# Altium PCB LedLampDriver.PcbDoc
Units mm, origin at the board's own origin, x right, y up, seen from the top; angles counter-clockwise.
Board outline 21.5 x 17 mm, 2 copper layers (Top Layer, Bottom Layer); 26 components, 10 nets, 57 pads, 96 vias.
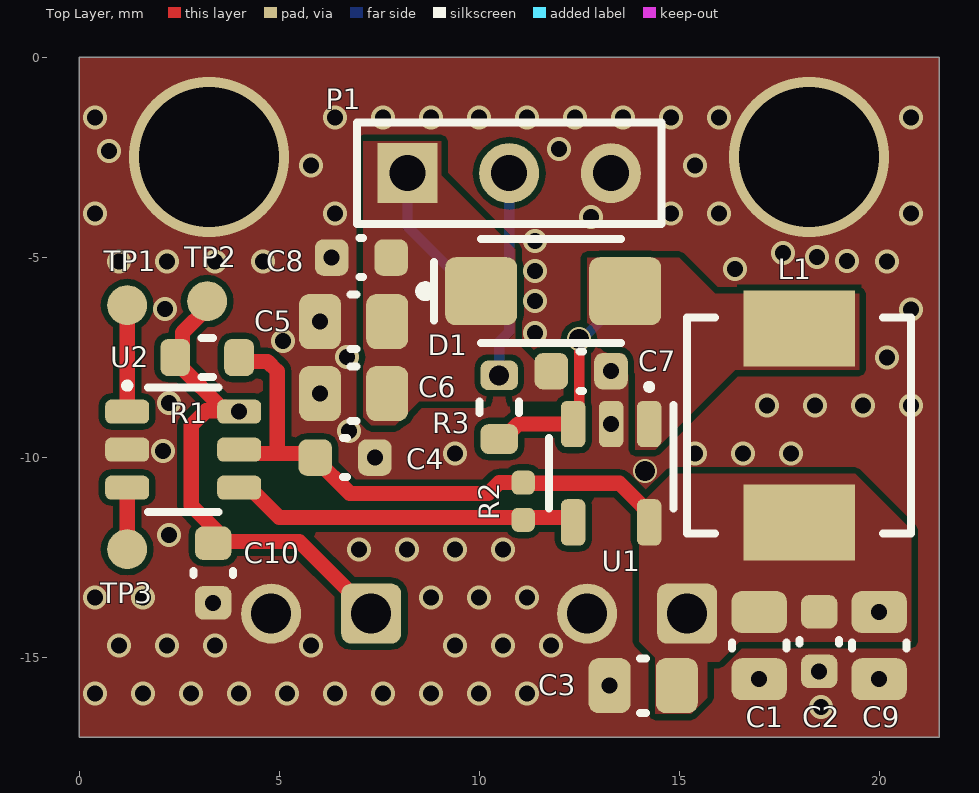
[diagram p0: Top Layer view]
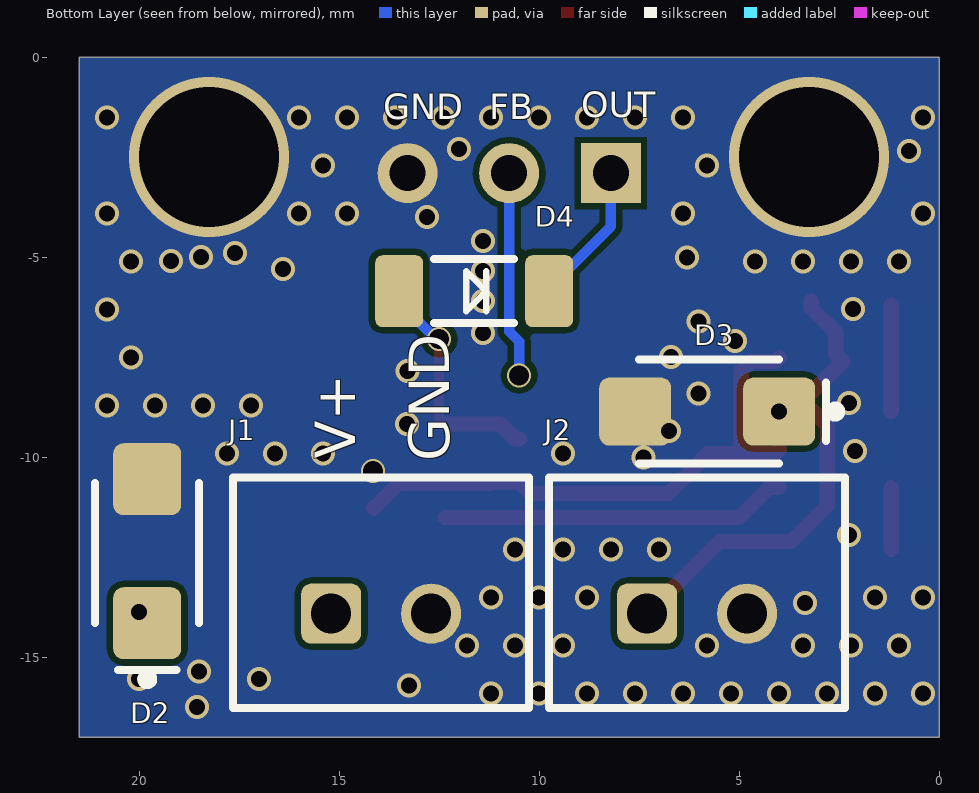
[diagram p1: Bottom Layer view, seen from below]
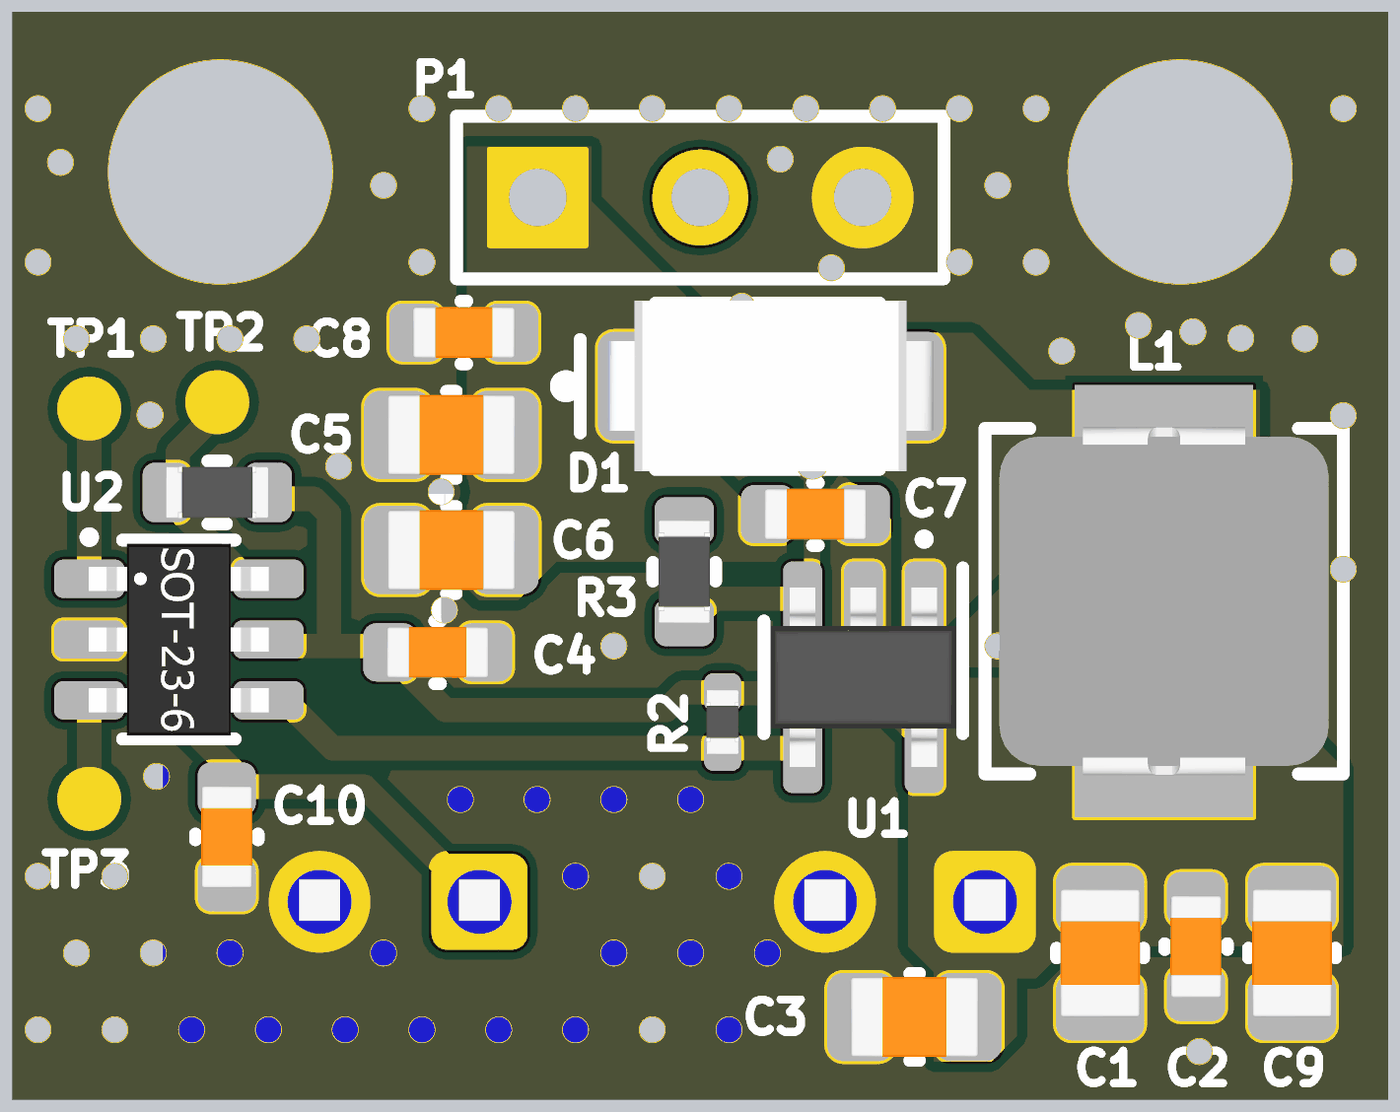
[diagram p2: 3D render of the assembled board from above, using the file's embedded part models]
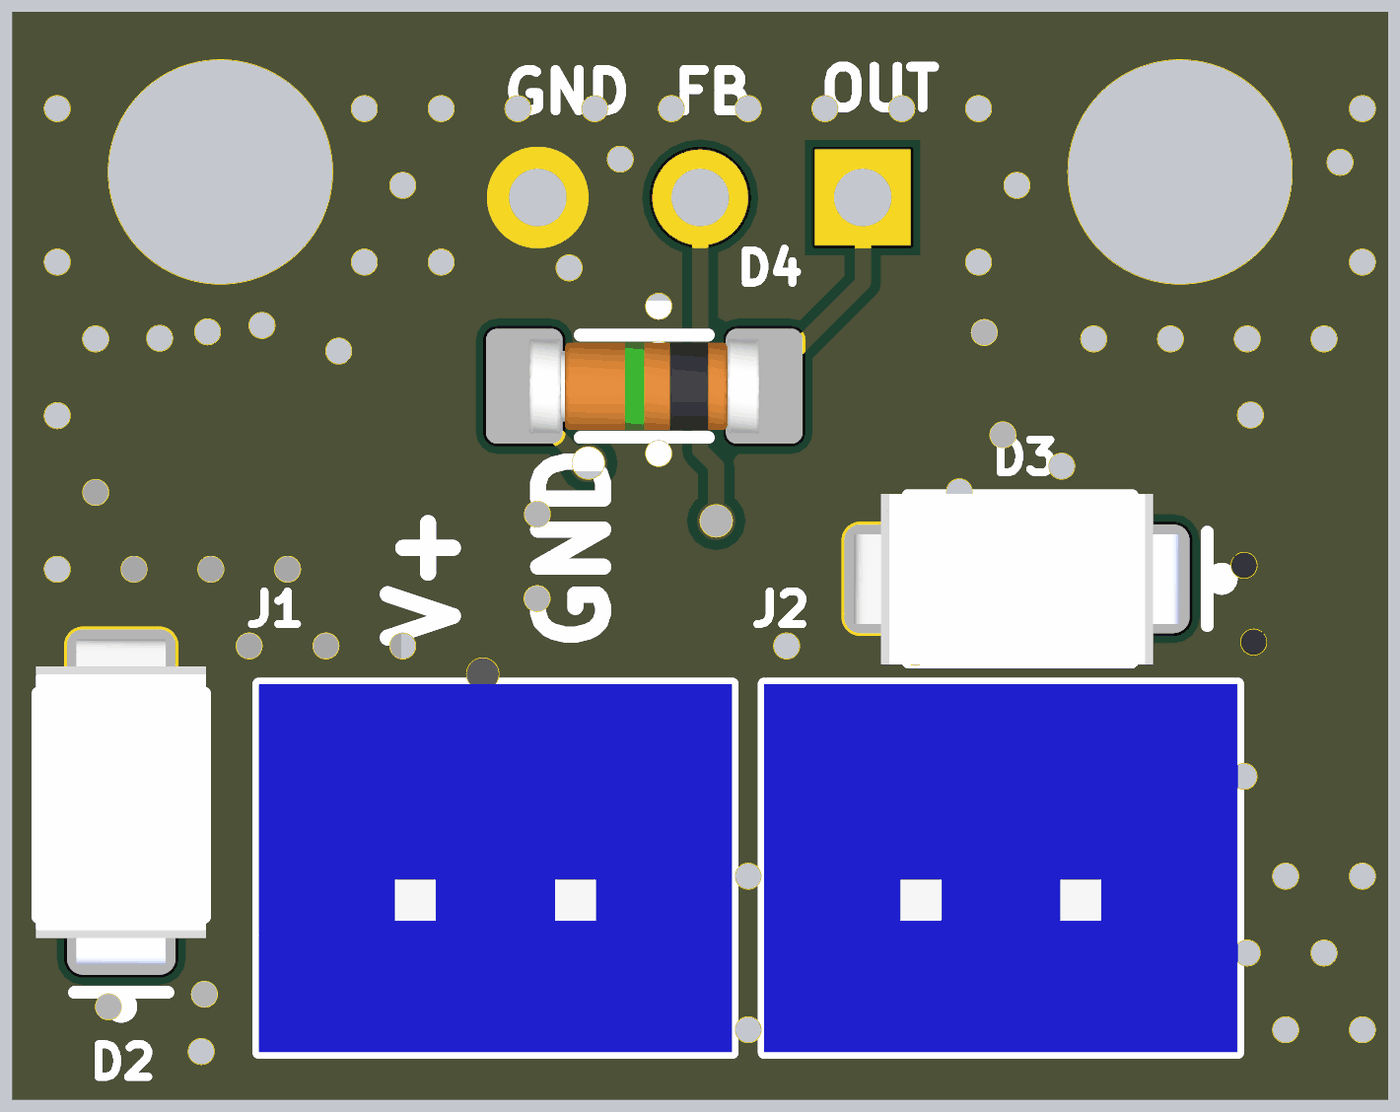
[diagram p3: 3D render of the assembled board from below, using the file's embedded part models]

## Layer stack, top to bottom
Top Solder: solder mask 0.0102, Solder Resist, Dk 3.5
Top Layer: signal copper 0.0356
Dielectric 1: dielectric 0.32, FR-4, Dk 4.8
Bottom Layer: signal copper 0.0356
Bottom Solder: solder mask 0.0102, Solder Resist, Dk 3.5

## Board outline
0,-17 0,0 21.5,0 21.5,-17

## Design rules (kind name [scope] priority, off if disabled: settings)
Clearance [All] p1: gap=0.15 ignorepadtopadclearanceinfootprint=FALSE except(0: Arc-Hole Track-Hole SMDPad-Hole THPad-Hole Via-Hole Fill-Hole Poly-Hole Region-Hole Text-Hole)
HoleSize [All] p1: absolutevalues=TRUE maxlimit=6.3 minlimit=0.2 maxpercent=80.000 minpercent=20.000
MinimumSolderMaskSliver [All] p1: minsoldermaskwidth=0.15
PlaneConnect [All] p1: planeconnectstyle=Direct reliefexpansion=0.508 reliefentries=4 reliefconductorwidth=0.254 reliefairgap=0.254
PolygonConnect [All] p1: connectstyle=Direct reliefconductorwidth=0.254 reliefentries=4 polygonreliefangle="90 Angle" airgapwidth=0.254
RoutingVias [All] p1: holewidth=0.6 width=0.35 viastyle="Through Hole" minholewidth=0.35 minwidth=0.3 maxholewidth=1.7 maxwidth=1.5
SilkToSilkClearance [All] p1: silktosilkclearance=0.15
SilkToSolderMaskClearance [IsPad] p1: minsilkscreentomaskgap=0.08 clearancetoexposedcopper=TRUE
SolderMaskExpansion [All] p1: expansion=0.045 istentingtop=FALSE
Width [All] p1: maxlimit=1.524 minlimit=0.203 preferedwidth=0.254 minimp=50.000000 maximp=50.000000 favimp=50.000000
25 further rules are at their usual default settings.

## Components (designator, comment, footprint, x,y, rotation, side; value= is the part's Value field where it differs from the comment)
C1 "10u" C0805_N 17,-14.71 r270 top
C2 "10u" C0603_N 18.5,-14.61 r270 top
C3 "100n" C0805_N 14.1,-15.71 r180 top
C4 "100n" C0603_N 6.645,-10.01 r0 top
C5 "10u" C0805_N 6.86,-6.61 r180 top
C6 "10u" C0805_N 6.86,-8.41 r180 top
C7 "1u" C0603_N 12.55,-7.85 r0 top
C8 "100n" C0603_N 7.055,-5.01 r180 top
C9 "100n" C0805_N 20,-14.71 r270 top
C10 "100n" C0603_N 3.35,-12.895 r270 top
D1 "DIODE" DO-214AC 11.85,-5.85 r0 top
D2 "SMAJ15A" DO-214AC 19.8,-12.35 r90 bottom
D3 "SMAJ15A" DO-214AC 5.8,-8.86 r0 bottom
D4 "DIODE_ZENER" SOD-80 11.625,-5.85 r0 bottom
J1 "" B2B-XH-A 15.2,-13.91 r180 bottom
J2 "" B2B-XH-A 7.3,-13.91 r180 bottom
L1 "4.7u" IHLP2020 18,-9.21 r90 top
P1 "Header 3" HDR1X3 8.21,-2.9 r0 top
R1 "10k" R0603_N 3.2,-7.51 r180 top
R2 "DNP" R0402_N 11.1,-11.1 r270 top
R3 "1k" R0603_N 10.5,-8.75 r90 top
TP1 "TP" TP_1MM 1.2,-6.2 r90 top
TP2 "TP" TP_1MM 3.2,-6.1 r90 top
TP3 "TP" TP_1MM 1.2,-12.3 r90 top
U1 "MIC2287C" SOT23-5 13.3,-10.4 r180 top
U2 "PIC10F200" SOT23-6 2.6,-9.81 r270 top

## Footprints (in the part's own frame and the unit in brackets; to place one, negate y for a bottom-side part, rotate by r counter-clockwise, add the part's x,y. Pads: shape width x height; smd on the part's side, far side on the other; paste and mask are expansions set on the pad)
B2B-XH-A [mm] "Header, Vertical, 2.50 mm pitch; 0.70 mm lead width, 5 pins, 1 row, 5 pins per row, 14.90 mm L X 5.75 mm W X 7.00 mm H body"
  rrect33% 1.5x1.5 / inner round 1.5 / far side rrect33% 1.5x1.5 hole 1 paste-1.5: 1(0,0)
  round 1.5 hole 1 paste-1.5: 2(2.5,0)
  silkscreen extent -2.45,-2.35 4.95,3.4, body extent -2.45,-2.35 4.95,3.4, height 7.05
C0603_N [mm] "Capacitor, Chip; 1.60 mm L X 0.80 mm W X 0.87 mm H body"
  rrect50% 0.84x0.91 smd: 1(-0.745,0) 2(0.745,0)
  silkscreen extent -0.05,-0.49 0.05,0.49, body extent -0.8,-0.4 0.8,0.4, height 0.87
C0805_N [mm] "Capacitor, Chip; 2.00 mm L X 1.25 mm W X 1.35 mm H body"
  rrect48% 1.05x1.38 smd: 1(-0.84,0) 2(0.84,0)
  silkscreen extent -0.08,-0.68 0.08,0.68, body extent -1,-0.63 1,0.63, height 1.35
DO-214AC [mm] "SMA"
  rrect30% 1.8x1.7 smd: A(1.8,0) C(-1.8,0)
  silkscreen extent -3.32,-1.3 1.7,1.3, body extent -2.55,-1.33 2.55,1.34, height 2.17
HDR1X3 [mm] "Connector; Header; 3 Position"
  rect 1.5x1.5 hole 0.9: 1(0,0)
  round 1.5 hole 0.9: 2(2.54,0) 3(5.08,0)
  silkscreen extent -1.27,-1.27 6.35,1.27
IHLP2020 [mm] "Inductor, 5.18mm L X 5.18mm W X 3 mm H body"
  rect 1.905x2.79 smd: 1(-2.425,0) 2(2.425,0)
  silkscreen extent -2.7,-2.8 2.7,2.8, body extent -2.73,-2.57 2.73,2.57, height 2.84
R0402_N [mm] "Resistor, Chip; 1.00 mm L X 0.50 mm W X 0.40 mm H body"
  rrect52% 0.6x0.58 smd: 1(-0.465,0) 2(0.465,0)
  body extent -0.5,-0.25 0.5,0.25, height 0.4
R0603_N [mm] "Resistor, Chip; 1.60 mm L X 0.80 mm W X 0.55 mm H body"
  rrect51% 0.74x0.93 smd: 1(-0.795,0) 2(0.795,0)
  silkscreen extent -0.15,-0.49 0.15,0.49, body extent -0.8,-0.4 0.8,0.4, height 0.55
SOD-80 [mm] "SOD-80"
  rrect30% 1.2x1.8 smd: A(1.875,0) C(-1.875,0)
  silkscreen extent -1,-0.8 1,0.8, body extent -1.8,-0.75 1.8,0.75, height 1.5
SOT23-5 [mm] "Small Outline Transistor (SOT23), 0.95 mm pitch; 5 pin, 2.90 mm L X 1.60 mm W X 1.45 mm H body"
  rrect49% 0.61x1.16 smd: 1(-0.95,-1.23) 2(0,-1.23) 3(0.95,-1.23) 4(0.95,1.23) 5(-0.95,1.23)
  silkscreen extent -1.56,-2.23 1.56,0.88, body extent -1.45,-1.4 1.45,1.4, height 1.45
SOT23-6 [mm] "Small Outline Transistor (SOT23), 0.95 mm pitch; 6 pin"
  rrect49% 0.6x1.1 smd: 1(-0.95,-1.4) 2(0,-1.4) 3(0.95,-1.4) 4(0.95,1.4) 5(0,1.4) 6(-0.95,1.4)
  silkscreen extent -1.68,-1.48 1.56,0.88, body extent -1.5,-1.4 1.5,1.4, height 0.86
TP_1MM [mm]
  round 1 smd paste-100 mask+0: 1(0,0)

## Part data
C1 C2 C3 C4 C5 C6 C7 C8 C9 C10: library part CAP, RevS="$Rev:: 58        $"
D2 D3: library part DIODE_ZENER
J1 J2: library part PINHDR_2X1, "Socket", ComponentLink1Description=Manufacturer, ComponentLink1URL=http://www.we-online.de, ComponentLink2Description=Datasheet, ComponentLink2URL=http://katalog.we-online.de/em/datasheet/691412320002.pdf
L1: library part IND, "Inductor"
P1: "Header, 3-Pin", LatestRevisionDate=17-Jul-2002, LatestRevisionNote="Re-released for DXP Platform.", Publisher="Altium Limited"
R1 R2 R3: library part RES
U1: "SOT-23 package"
U2: "6-Pin, 8-Bit Flash MCU"

## Via types
v1: diameter 0.6, hole 0.4, Top Layer to Bottom Layer, tented both sides, 91 vias
v2: diameter 0.6, hole 0.5, Top Layer to Bottom Layer, tented both sides, 3 vias
v3: diameter 4, hole 3.5, Top Layer to Bottom Layer, tented both sides, 2 vias

## Nets (pads, with @x,y where several pads share a name; then routed paths per layer and width w, separated by ;. In a path a pad name is that pad's centre, name@x,y a point inside that pad or via, vN(x,y) a via of type N, cw(c..) or ccw(c..) an arc to the next point about the centre after c; other vN are vias at no path point)
CTRL: R2.2 U1.4 U2.4 | length 8.7
  Top Layer w0.381: U2.4 4.25,-10.76 5,-11.51 10.75,-11.51 11.2,-11.51 U1.4@12.35,-11.51
FB: P1.2 R3.2 | length 5.2
  Bottom Layer w0.254: v2(10.5,-7.955) 10.5,-7.106 10.75,-6.856 P1.2
GND: C1.2 C2.2 C3.2 C4.2 C5.2 C6.2 C7.2 C8.2 C9.2 C10.2 D2.A D3.A J1.2 J2.2 P1.3 U1.2 U2.2
  other v1: 18.55,-16.25 0.4,-15.91 1.6,-15.91 2.8,-15.91 4,-15.91 5.2,-15.91 6.4,-15.91 7.6,-15.91 8.8,-15.91 10,-15.91 11.2,-15.91 13.26,-15.71 17,-15.55 20,-15.55 18.5,-15.355 1,-14.71 2.2,-14.71 3.4,-14.71 5.8,-14.71 9.4,-14.71 10.6,-14.71 11.8,-14.71 3.35,-13.64 0.4,-13.51 1.6,-13.51 8.8,-13.51 10,-13.51 11.2,-13.51 7,-12.31 8.2,-12.31 9.4,-12.31 10.6,-12.31 2.25,-11.95 7.39,-10.01 9.4,-9.91 15.4,-9.91 16.6,-9.91 17.8,-9.91 2.1,-9.85 6.75,-9.35 13.3,-9.17 17.2,-8.71 18.4,-8.71 19.6,-8.71 20.8,-8.71 2.25,-8.65 6.02,-8.41 13.295,-7.85 20.2,-7.51 6.7,-7.5 5.1,-7.1 11.4,-6.9 6.02,-6.61 2.15,-6.3 20.8,-6.31 11.4,-6.1 11.4,-5.35 16.4,-5.3 1,-5.11 2.2,-5.11 3.4,-5.11 4.6,-5.11 19.2,-5.1 20.2,-5.11 6.31,-5.01 18.45,-5 17.6,-4.9 11.4,-4.6 12.8,-4 0.4,-3.91 6.4,-3.91 14.8,-3.91 16,-3.91 20.8,-3.91 5.8,-2.71 15.4,-2.71 0.75,-2.35 12,-2.3 0.4,-1.51 6.4,-1.51 7.6,-1.51 8.8,-1.51 10,-1.51 11.2,-1.51 12.4,-1.51 13.6,-1.51 14.8,-1.51 16,-1.51 20.8,-1.51
  other v2: 14.15,-10.35
  other v3: 3.25,-2.5 18.25,-2.5
NetD1_A: D1.A L1.2 U1.1
NetD4_A: D4.A R3.1 U1.3 | length 5.8
  Top Layer w0.254: U1.3 12.502,-9.018 12.502,-7.052 v2(12.5,-7.05)
  Top Layer w0.381: R3.1 10.595,-9.545 10.97,-9.17 U1.3
  Bottom Layer w0.254: v2(12.5,-7.05) 12.571,-7.05 13.5,-6.121 D4.A
NetTP1_1: TP1.1 U2.1 | length 2.7
  Top Layer w0.381: U2.1 TP1.1
NetTP3_1: TP3.1 U2.3 | length 1.5
  Top Layer w0.381: TP3.1 U2.3
SW: C10.1 D3.C J2.1 R1.2 TP2.1 U2.6 | length 12.7
  Top Layer w0.381: TP2.1 3.2,-6.268 2.585,-6.883 2.585,-7.425 2.405,-7.605 2.585,-7.785 3.551,-8.751 3.64,-8.751 3.66,-8.77 3.66,-8.86 v1(4,-8.86) ; U2.6@3.75,-8.84 3.551,-8.84 3.17,-8.84 2.8,-9.21 2.8,-11.21 3.7,-12.11 5.5,-12.11 J2.1
Vin: C1.1 C2.1 C3.1 C4.1 C9.1 D2.C J1.1 L1.1 R1.1 R2.1 U1.5 U2.5 | length 14
  Top Layer w0.381: R1.1 4.095,-7.61 4.71,-7.61 4.95,-7.85 4.95,-9.91 ; U2.5 4.1,-9.91 4.95,-9.91 ; R2.1 10.5,-10.635 10.225,-10.91 6.765,-10.91 5.9,-10.045 C4.1 5.8,-9.91 4.95,-9.91 ; R2.1@11.2,-10.65 13.509,-10.65 U1.5@14.135,-11.275
  other v1: 20,-13.87
Vout: C5.1 C6.1 C7.1 C8.1 D1.C D4.C P1.1 | length 3.8
  Bottom Layer w0.254: P1.1 8.21,-4.235 9.75,-5.775 D4.C@10.05,-5.775

## Polygon pours and split planes (outlines as drawn)
GND on Top Layer "Top Layer-No Net" (solid, pour order 3): 0,-17 0,0 21.5,0 21.5,-17
NetD1_A on Top Layer "NETD1_A_L01_P001" (solid, pour order 1): 19.5,-5.91 19.5,-7.81 16.4,-7.81 14.4,-9.81 13.9,-9.81 13.9,-7.91 13.1,-7.11 12.7,-7.11 12.7,-5.01 15,-5.01 15.9,-5.91
Vin on Top Layer "VIN_L01_P000" (solid, pour order 0): 14.4,-16.41 15.3,-16.41 15.7,-16.01 15.7,-15.11 16,-15.11 16.5,-14.61 20.8,-14.61 20.8,-11.81 19.4,-10.41 14.8,-10.41 13.9,-11.31 14,-11.41 14,-14.61 14.4,-15.01
Vout on Top Layer "VOUT_L01_P002" (solid, pour order 2): 12.1,-8.6 8.5,-8.6 7.9,-9.2 7.3,-9.2 7.1,-9 7.1,-4.3 7.1,-2.1 9.05,-2.1 9.05,-2.95 10.9,-4.8 10.9,-7.1 11.4,-7.6 12.1,-7.6
GND on Bottom Layer "Top Layer-No Net1" (solid, pour order 4): 0,-17 0,0 21.5,0 21.5,-17

## Silkscreen, mask and mechanical layers (free items; w line width, h text height)
Bottom Overlay:
  text "OUT" at 8.948,-1.498 h0.64
  text "FB" at 11.248,-1.548 h0.64
  text "GND" at 13.898,-1.548 h0.64
  text "V+" at 14.604,-10.043 h1.02 r270
  text "GND" at 12.254,-10.096 h1.02 r270
Mechanical 1:
  the board outline again, w0.2